# EAGLE board firefly (EAGLE 5.11)
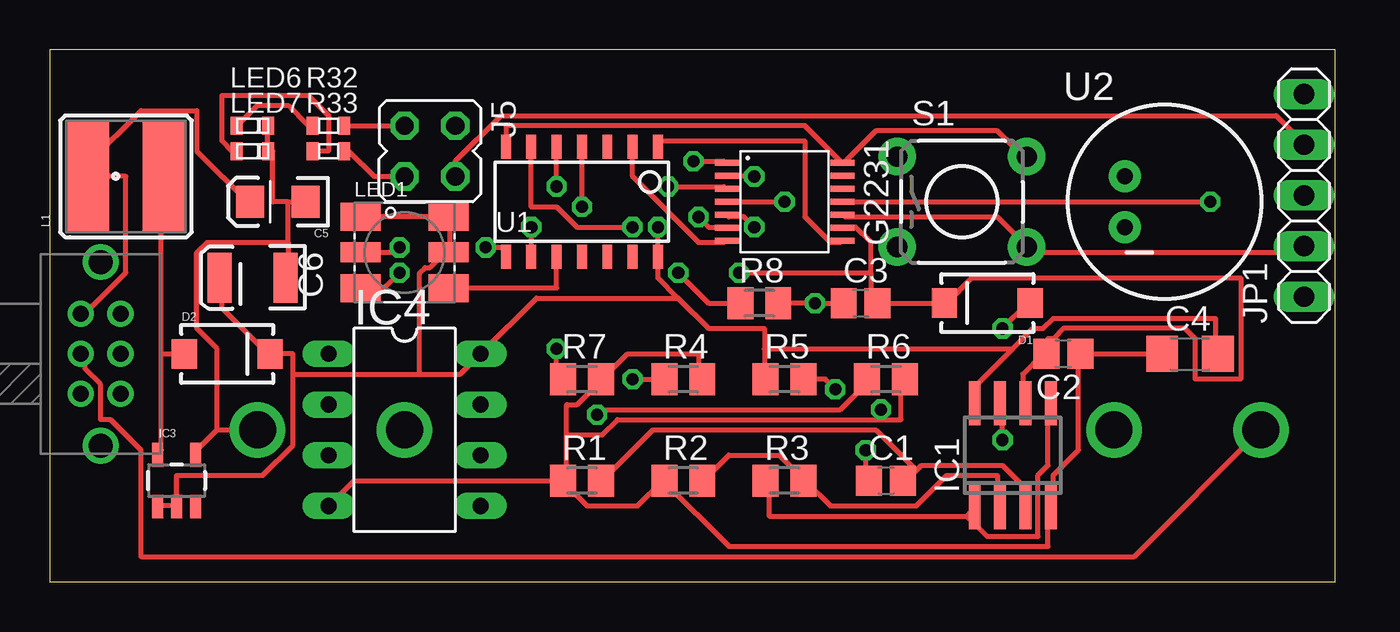
[diagram p0: board, top side]
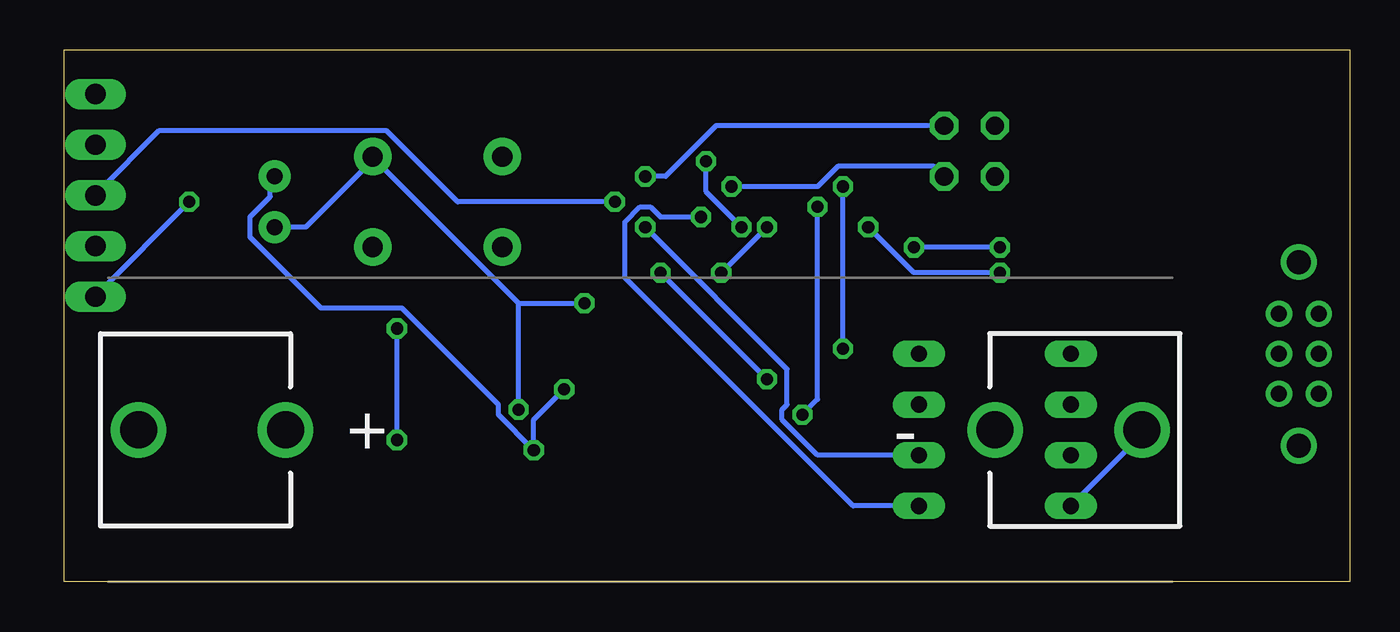
[diagram p1: board, bottom side, seen from below]

Size 64.44 x 26.66 mm. Coordinates in mm from the lower left corner, seen from the top.
Outline: 0,0 64.44,0 64.44,26.66 0,26.66 0,0
Copper layers (1*16): Top 0.035mm / dielectric 1.5mm / Bottom 0.035mm
Design rules "default": minimum track width 10mil, minimum drill 24mil, track to track 8mil, track to pad 8mil, pad to pad 8mil, via to via 8mil, smd to smd 8mil, copper to edge 40mil, drill to drill 8mil, minimum pad ring 10mil, minimum via ring 8mil, stop-mask expansion 4mil, vias tented up to drill 0mil, thermal gap 10mil
Net classes: 0 default: width 0.254 mm; 1 Ground: width 0.1 mm, drill 0.2 mm

## Footprints (pad centres in the part's own frame; a part is rotated, then mirrored left to right if it is on the bottom)
BATTERY-AA = drill 1.854 round: GND@1 25.146,0; GND@2 17.78,0; PWR@1 -25.146,0; PWR@2 -17.78,0
C2012 = smd 1.3 x 1.5: 1 -0.85,0; 2 0.85,0
C3216 = smd 1.6 x 1.8: 1 -1.4,0; 2 1.4,0
EIA3216 = smd 1.4 x 1.6: A 1.4,0; C -1.4,0
EIA3528 = smd 1.2 x 2.5: A 1.65,0; C -1.65,0
SMA-DIODE = smd 1.27 x 1.47: A -2.15,0; C 2.15,0
PW14 = smd 0.3 x 1.2: 1 -1.95,-2.9; 2 -1.3,-2.9; 3 -0.65,-2.9; 4 0,-2.9; 5 0.65,-2.9; 6 1.3,-2.9; 7 1.95,-2.9; 8 1.95,2.9; 9 1.3,2.9; 10 0.65,2.9; 11 0,2.9; 12 -0.65,2.9; 13 -1.3,2.9; 14 -1.95,2.9
SO08 = smd 0.6 x 2.2: 1 -1.905,-2.6; 2 -0.635,-2.6; 3 0.635,-2.6; 4 1.905,-2.6; 5 1.905,2.6; 6 0.635,2.6; 7 -0.635,2.6; 8 -1.905,2.6
SOT23-5 = smd 0.55 x 1.2: 1 -0.95,-1.3; 2 0,-1.3; 3 0.95,-1.3; 4 0.95,1.3; 5 -0.95,1.3
DIL8 = drill 0.813 long: 1 -3.81,-3.81; 2 -1.27,-3.81; 3 1.27,-3.81; 4 3.81,-3.81; 5 3.81,3.81; 6 1.27,3.81; 7 -1.27,3.81; 8 -3.81,3.81
JP2Q = drill 0.914 octagon: 1 -1.27,-1.27; 2 -1.27,1.27; 3 1.27,-1.27; 4 1.27,1.27
1X05 = drill 1.016 long: 1 -5.08,0; 2 -2.54,0; 3 0,0; 4 2.54,0; 5 5.08,0
CR54 = smd 5.5 x 2.15: P$1 0,1.92; P$2 0,-1.92
LED-TRICOLOR-5050 = smd 2 x 1.4: 1 2.2,1.8; 2 -2.2,1.8; 5 2.2,-1.8; 6 -2.2,-1.8 | smd 2 x 1: 3 2.2,0; 4 -2.2,0
DIODE0603 = smd 0.6 x 0.9: A -0.787,0; K 0.787,0
M2012 = smd 1.3 x 1.6: 1 -0.95,0; 2 0.95,0
0603 = smd 0.6 x 0.9: 1 -0.787,0; 2 0.787,0
TACTILE-PTH = drill 1.016 pad 1.88 round: 1 -3.251,2.261; 2 3.251,2.261; 3 -3.251,-2.261; 4 3.251,-2.261
EG2211 = drill 0.8 round: P1 -1,0; P1-TA -1,2; P1-TB -1,-2; P2 1,0; P2-TA 1,2; P2-TB 1,-2 | drill 1.2 round: P$7 0,4.6; P$8 0,-4.6
SOP-14 = smd 0.5 x 1.2: 1 -3.81,-2.75; 2 -2.54,-2.75; 3 -1.27,-2.75; 4 0,-2.75; 5 1.27,-2.75; 6 2.54,-2.75; 7 3.81,-2.75; 8 3.81,2.75; 9 2.54,2.75; 10 1.27,2.75; 11 0,2.75; 12 -1.27,2.75; 13 -2.54,2.75; 14 -3.81,2.75
MIC9.7MM = drill 0.8 pad 1.6 round: GND -2,-1.27; PLUS -2,1.27

## Placement (x,y rotation side)
BAT1  [BATTERY-AA]  35.56,7.62 0 bottom
C1  0.1uF  [C2012]  41.91,5.08 0 top
C2  0.1uF  [C2012]  50.8,11.43 180 top
C3  0.1uF  [C2012]  40.64,13.97 0 top
C4  [C3216]  57.15,11.43 0 top
C5  10uF  [EIA3216]  11.43,19.05 180 top
C6  47uF  [EIA3528]  10.16,15.24 180 top
D1  1N4148DO35-7  [SMA-DIODE]  46.99,13.97 180 top
D2  MBRA140  [SMA-DIODE]  8.89,11.43 0 top
G2231  [PW14]  36.83,19.05 270 top
IC1  LM358D  [SO08]  48.26,6.35 0 top
IC3  [SOT23-5]  6.35,5.08 0 top
IC4  [DIL8]  17.78,7.62 270 top
J5  [JP2Q]  19.05,21.59 270 top
JP1  [1X05]  62.86,19.37 90 top
L1  22uH  [CR54]  3.81,20.32 90 top
LED1  [LED-TRICOLOR-5050]  17.78,16.51 0 top
LED6  [DIODE0603]  10.16,22.86 0 top
LED7  [DIODE0603]  10.16,21.59 0 top
R1  10k  [M2012]  26.67,5.08 0 top
R2  2.2k  [M2012]  31.75,5.08 0 top
R3  100k  [M2012]  36.83,5.08 0 top
R4  100k  [M2012]  31.75,10.16 0 top
R5  10k  [M2012]  36.83,10.16 0 top
R6  27  [M2012]  41.91,10.16 0 top
R7  27  [M2012]  26.67,10.16 0 top
R8  27  [M2012]  35.56,13.97 0 top
R32  [0603]  13.97,22.86 0 top
R33  [0603]  13.97,21.59 0 top
S1  ITS-1187(SMD)  [TACTILE-PTH]  45.72,19.05 0 top
S2  SWITCH-DPDTEG2211  [EG2211]  2.54,11.43 0 top
U1  [SOP-14]  26.67,19.05 180 top
U2  MIC  [MIC9.7MM]  55.88,19.05 0 top

## Library data of the parts
BAT1 C5 C6 D1 D2 IC3 L1 LED1 S1 S2 U1 = SparkFun
C1-C4 R1-R8 = resistor
G2231 = TI_MSP430_v16
IC1 = linear
IC4 = microchip; MF: MICROCHIP; MPN: 24LC256-E/P; OC_FARNELL: 9757970; OC_NEWARK: 92C7169
J5 = stexas
JP1 = pinhead
LED6 LED7 = SMD
R32 R33 = ssmd
U2 = fetm

## Nets
3.3V: C4.2 C6.A D2.C G2231.1 IC1.8 IC3.1 IC3.2 IC4.8 LED1.1 LED1.2 LED1.3 R5.1 U1.14
GND: BAT1.GND@1 C2.1 C3.1 C4.1 C5.C C6.C G2231.14 IC1.4 IC3.4 IC4.4 LED6.K LED7.K R1.1 R2.1 R4.2 R6.2 R7.2 R8.2 S1.2 U1.7 U2.GND
N$1: C1.2 IC1.3 R1.2
N$2: IC1.2 R2.2 R3.2
N$3: LED1.4 U1.8
N$4: IC1.1 IC1.5 R3.1
N$5: D1.A IC1.7
N$6: LED1.6 U1.9
N$7: LED1.5 U1.10
N$8: R6.1 U1.4
N$10: C1.1 R5.2 U2.PLUS
N$11: R7.1 U1.5
N$12: R8.1 U1.6
N$13: D2.A IC3.5 L1.P$2
N$14: LED7.A R33.1
N$15: J5.3 R33.2
N$16: BAT1.PWR@1 S2.P1
N$17: C5.A L1.P$1 S2.P1-TA
N$33: J5.1 R32.2
N$34: LED6.A R32.1
P1.0: G2231.2 J5.2
P1.1(TXD): G2231.3 J5.4 JP1.4
P1.2(RXD): G2231.4 JP1.3
P1.3(SDA): G2231.5 IC4.6
P1.4(SCL): G2231.6 IC4.5
P1.5(SDI): G2231.7 U1.2
P1.6(CKI): G2231.8 U1.1
P1.7(MIC): C2.2 C3.2 D1.C G2231.9 IC1.6 R4.1
P2.6: G2231.13
P2.7: G2231.12
RST/SBWTDIO: G2231.10 JP1.2 S1.4
TEST: G2231.11 JP1.1

## Tracks (layer width: path | path; a pad name or v marks a point on that pad's centre or on a via)
3.3V  (via drill 0.61)
  Top 0.254: LED1.2 15.75,18.29 19.81,18.29 LED1.1 20.07,18.29 20.07,16.51 LED1.3 19.81,16.51 19.05,15.75 18.8,15.75 18.54,15.49 18.54,10.41 | 6.35,3.81 5.59,3.81 IC3.1 | C6.A 8.64,15.24 8.64,13.72 10.92,11.43 D2.C 12.19,11.43 12.19,10.41 | 6.35,3.81 6.35,5.33 10.67,5.33 12.19,6.86 12.19,10.41 | IC3.2 6.35,3.81 | 12.19,10.41 18.54,10.41 | 18.54,10.41 20.57,10.41 IC4.8 24.38,14.22 31.5,14.22 | v32.26,21.08 33.78,21.08 G2231.1 | v30.48,17.78 U1.14 30.48,15.24 31.5,14.22 | 35.81,11.68 35.81,12.7 33.02,12.7 31.5,14.22 | 35.81,11.68 35.81,10.16 R5.1 | 48.26,11.68 46.48,9.91 46.48,9.14 IC1.8 | 48.26,11.68 49.28,12.7 49.78,12.7 50.29,13.21 58.42,13.21 58.42,11.43 C4.2 | 35.81,11.68 48.26,11.68
  Bottom 0.254: v32.26,21.08 32.26,19.56 v30.48,17.78
GND  (via drill 0.61)
  Top 0.254: C3.1 v38.35,13.97 R8.2 | S1.2 48.77,21.34 47.5,22.61 41.4,22.61 39.88,21.08 G2231.14 39.62,21.08 37.85,22.86 22.86,22.86 U1.7 | LED6.K 10.92,22.86 10.92,21.59 LED7.K 11.18,21.59 11.18,19.05 11.94,19.05 | 11.94,19.05 C5.C | 11.94,17.02 11.94,19.05 | 11.94,17.02 11.94,15.24 C6.C | 8.38,7.62 7.37,6.6 IC3.4 | 8.38,7.62 BAT1.GND@1 | 11.94,17.02 7.87,17.02 7.37,16.51 7.37,12.7 8.38,11.68 8.38,7.62 | C4.1 C2.1 51.56,11.43 51.56,6.6 50.29,5.33 50.29,3.81 IC1.4 50.04,3.56 50.04,1.78 34.04,1.78 30.73,5.08 | 25.91,7.37 25.91,8.89 26.42,8.89 27.69,10.16 | 25.91,7.37 25.91,5.08 R1.1 25.65,5.08 | 30.73,5.08 29.46,3.81 26.92,3.81 25.65,5.08 | 27.69,10.16 28.96,11.43 32.51,11.43 32.51,10.16 R4.2 | 27.69,10.16 R7.2 | 41.66,8.13 28.45,8.13 27.69,7.37 25.91,7.37 | 41.66,8.13 42.67,8.13 42.67,10.16 R6.2 | 30.73,5.08 R2.1 | IC4.4 15.24,5.08 25.65,5.08 | 41.66,8.13 v41.66,8.64
  Bottom 0.254: 41.66,13.97 v38.35,13.97 | 41.66,13.97 48.77,21.08 S1.2 49.02,21.08 52.32,17.78 U2.GND | IC4.4 10.41,7.37 BAT1.GND@1 | v41.66,8.64 41.66,13.97
N$1
  Top 0.254: 43.43,5.59 43.69,5.84 47.75,5.84 48.77,4.83 48.77,3.81 IC1.3 | 43.43,5.59 42.93,5.08 C1.2 | 43.43,5.59 41.4,7.62 30.23,7.62 27.69,5.08 R1.2
N$2
  Top 0.254: 37.85,5.08 36.58,6.35 34.04,6.35 32.77,5.08 R2.2 | 37.85,5.08 39.12,3.81 43.43,3.81 44.96,5.33 47.5,5.33 47.5,3.81 IC1.2 | 37.85,5.08 R3.2
N$3  (via drill 0.61)
  Top 0.254: v21.84,16.76 22.61,16.76 22.86,16.51 U1.8 | v17.53,16.76 17.27,16.51 LED1.4
  Bottom 0.254: v17.53,16.76 v21.84,16.76
N$4
  Top 0.254: 45.97,3.3 36.07,3.3 36.07,5.08 R3.1 | 45.97,3.3 46.23,3.56 IC1.1 | 45.97,3.3 46.99,2.29 49.53,2.29 49.53,5.33 50.04,5.84 50.04,8.89 IC1.5
N$5  (via drill 0.61)
  Top 0.254: v47.75,12.7 49.02,13.97 D1.A | v47.75,7.11 47.75,8.89 IC1.7
  Bottom 0.254: v47.75,7.11 v47.75,12.7
N$6  (via drill 0.61)
  Top 0.254: v17.53,15.49 16.76,14.73 15.75,14.73 LED1.6 | v24.13,17.78 U1.9
  Bottom 0.254: v24.13,17.78 21.84,15.49 v17.53,15.49
N$7
  Top 0.254: U1.10 25.4,14.73 20.07,14.73 LED1.5
N$8  (via drill 0.61)
  Top 0.254: v27.43,8.38 27.69,8.64 39.62,8.64 41.15,10.16 R6.1 | v26.67,18.8 U1.4
  Bottom 0.254: v26.67,18.8 26.67,9.14 v27.43,8.38
N$10  (via drill 0.61)
  Top 0.254: v40.89,6.6 40.89,5.08 C1.1 | v39.37,9.65 38.86,10.16 R5.2
  Bottom 0.254: v39.37,9.65 40.89,8.13 v40.89,6.6 42.67,8.38 42.67,8.89 47.5,13.72 51.56,13.72 55.12,17.27 55.12,18.29 54.1,19.3 54.1,20.32 U2.PLUS
N$11  (via drill 0.61)
  Top 0.254: v25.4,11.68 25.4,10.16 R7.1 | v25.4,19.81 U1.5
  Bottom 0.254: v25.4,11.68 v25.4,19.81
N$12  (via drill 0.61)
  Top 0.254: v29.21,17.78 26.42,17.78 25.4,18.8 24.13,18.8 U1.6 | v31.5,15.49 33.02,13.97 R8.1
  Bottom 0.254: v29.21,17.78 v31.5,15.49
N$13
  Top 0.254: 5.59,11.43 5.59,6.6 IC3.5 | 5.59,11.43 D2.A | 5.59,11.43 5.59,20.32 L1.P$2
N$14
  Top 0.254: LED7.A 9.14,21.59 8.64,22.1 8.64,24.38 12.95,24.38 13.97,23.37 13.97,21.59 R33.1
N$15
  Top 0.254: J5.3 16.26,20.32 14.99,21.59 R33.2
N$16
  Top 0.254: BAT1.PWR@1 54.36,1.27 4.57,1.27 4.57,6.6 3.05,8.13 2.54,8.13 2.54,9.91 1.78,10.67 1.78,11.43 S2.P1
N$17
  Top 0.254: 2.03,20.32 2.03,21.08 4.57,23.62 7.37,23.62 7.37,21.59 9.91,19.05 C5.A | 2.03,20.32 3.81,20.32 3.81,15.49 1.78,13.46 S2.P1-TA | 2.03,20.32 L1.P$1
N$33
  Top 0.254: R32.2 J5.1
N$34
  Top 0.254: LED6.A 9.4,22.86 10.41,23.88 11.94,23.88 12.95,22.86 R32.1
P1.0  (via drill 0.61)
  Top 0.254: v35.31,20.32 34.04,20.32 G2231.2
  Bottom 0.254: v35.31,20.32 34.29,20.32 31.75,22.86 J5.2
P1.1(TXD)  (via drill 0.61)
  Top 0.254: v30.99,19.81 33.78,19.81 G2231.3 | J5.4 20.32,21.08 22.61,23.37 61.47,23.37 62.74,22.1 JP1.4
  Bottom 0.254: v30.99,19.81 26.67,19.81 25.65,20.83 20.83,20.83 J5.4
P1.2(RXD)  (via drill 0.61)
  Top 0.254: G2231.4 v36.83,19.05
  Bottom 0.254: v36.83,19.05 44.7,19.05 48.26,22.61 59.69,22.61 62.74,19.56 JP1.3
P1.3(SDA)  (via drill 0.61)
  Top 0.254: v35.31,17.78 34.8,18.29 34.04,18.29 G2231.5
  Bottom 0.254: v35.31,17.78 28.19,10.67 28.19,8.89 28.45,8.64 28.45,8.13 26.67,6.35 IC4.6
P1.4(SCL)  (via drill 0.61)
  Top 0.254: v32.51,18.29 33.02,17.78 33.78,17.78 G2231.6
  Bottom 0.254: v32.51,18.29 34.54,18.29 35.05,18.8 35.56,18.8 36.32,18.03 36.32,15.24 24.89,3.81 IC4.5
P1.5(SDI)
  Top 0.254: G2231.7 33.78,17.02 32.51,17.02 29.21,20.32 U1.2
P1.6(CKI)
  Top 0.254: G2231.8 39.62,17.02 39.12,17.02 37.85,18.29 37.85,22.1 30.73,22.1 30.48,21.84 U1.1
P1.7(MIC)  (via drill 0.61)
  Top 0.254: IC1.6 48.77,9.14 48.77,10.41 49.78,11.43 C2.2 50.04,11.43 50.04,12.19 50.29,12.19 50.8,12.7 56.9,12.7 57.4,12.19 57.4,10.16 59.69,10.16 59.69,15.24 46.23,15.24 44.96,13.97 D1.C C3.2 41.15,13.97 41.15,15.49 | 41.15,15.49 41.15,17.02 40.39,17.78 39.88,17.78 G2231.9 | v34.54,15.49 41.15,15.49 | v29.21,10.16 R4.1
  Bottom 0.254: v29.21,10.16 v34.54,15.49
RST/SBWTDIO
  Top 0.254: G2231.10 39.88,18.29 47.5,18.29 48.77,17.02 S1.4 49.02,16.76 49.28,16.51 62.48,16.51 62.74,16.76 JP1.2
TEST  (via drill 0.61)
  Top 0.254: G2231.11 v58.17,19.05
  Bottom 0.254: v58.17,19.05 62.74,14.48 JP1.1